# Altium PCB STM32F030F4P6.PcbDoc
Units mil, origin at the board's own origin, x right, y up, seen from the top; angles counter-clockwise.
Board outline 2155 x 3145 mil, 2 copper layers (Top Layer, Bottom Layer); 72 components, 48 nets, 343 pads, 0 vias.
Unrouted connection lines stored in the file: 1.
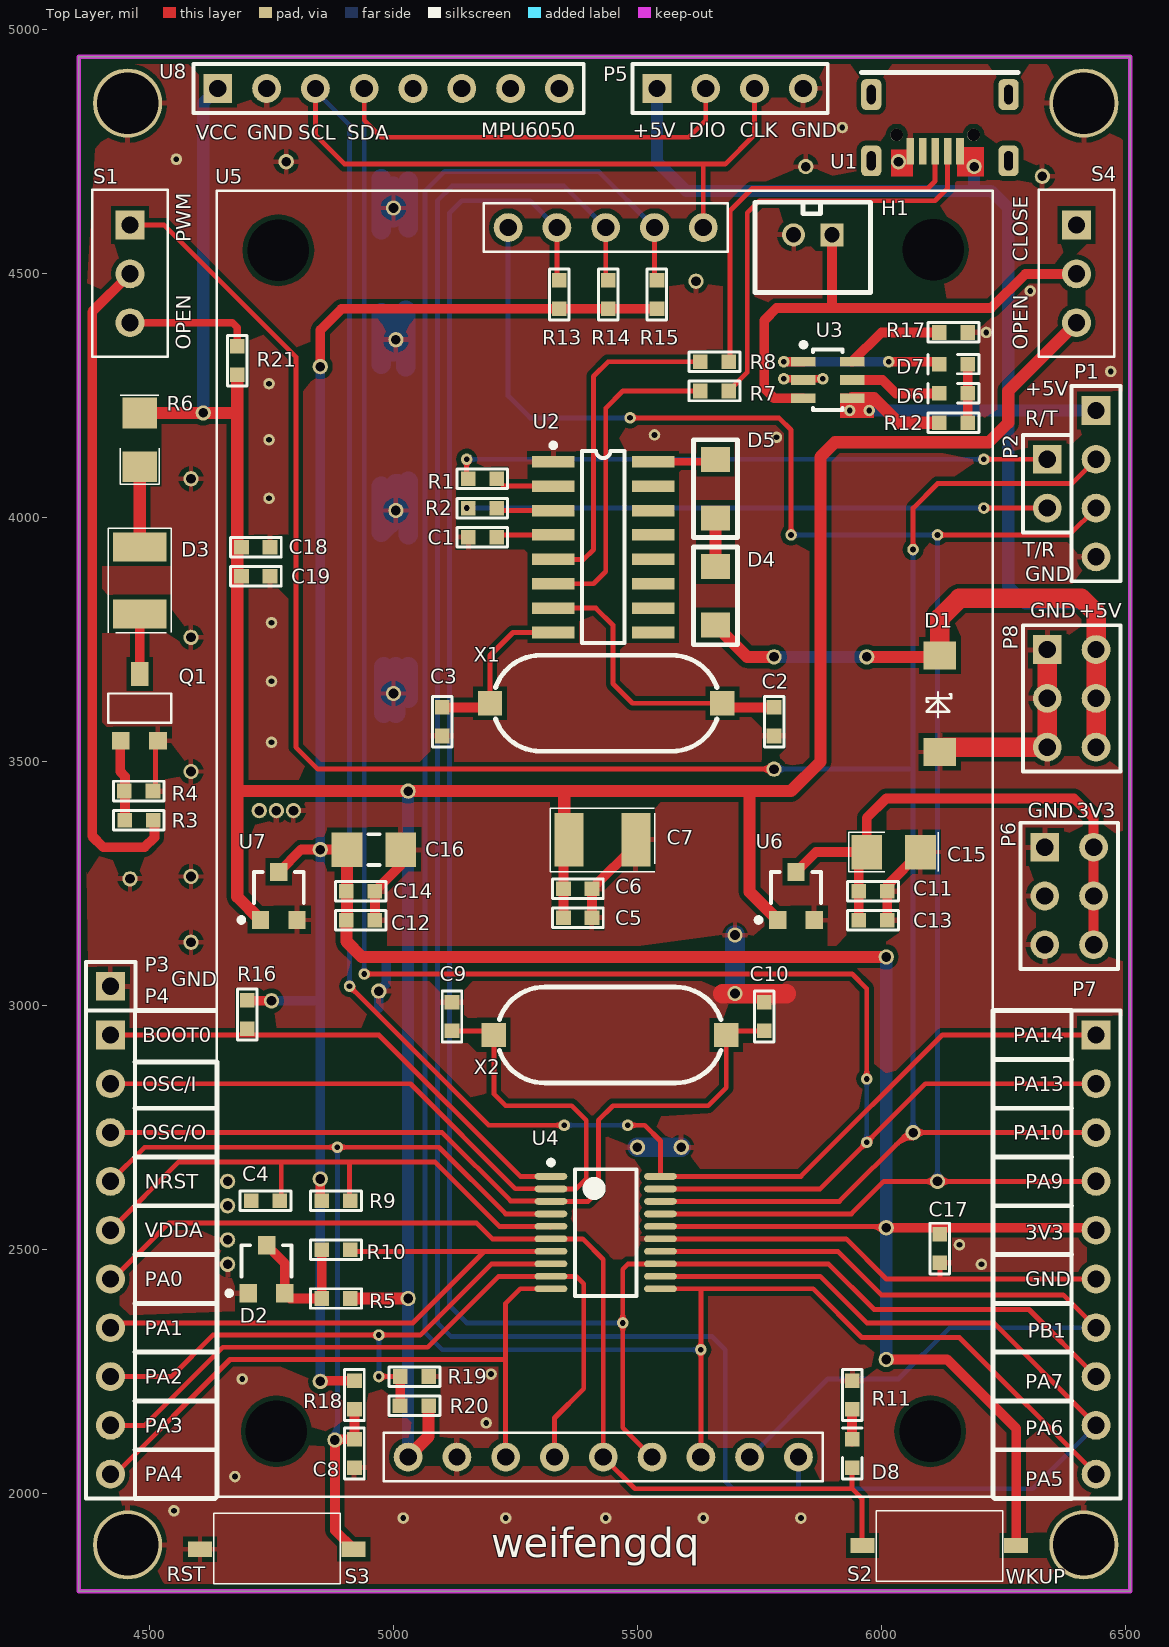
[diagram p0: Top Layer view]
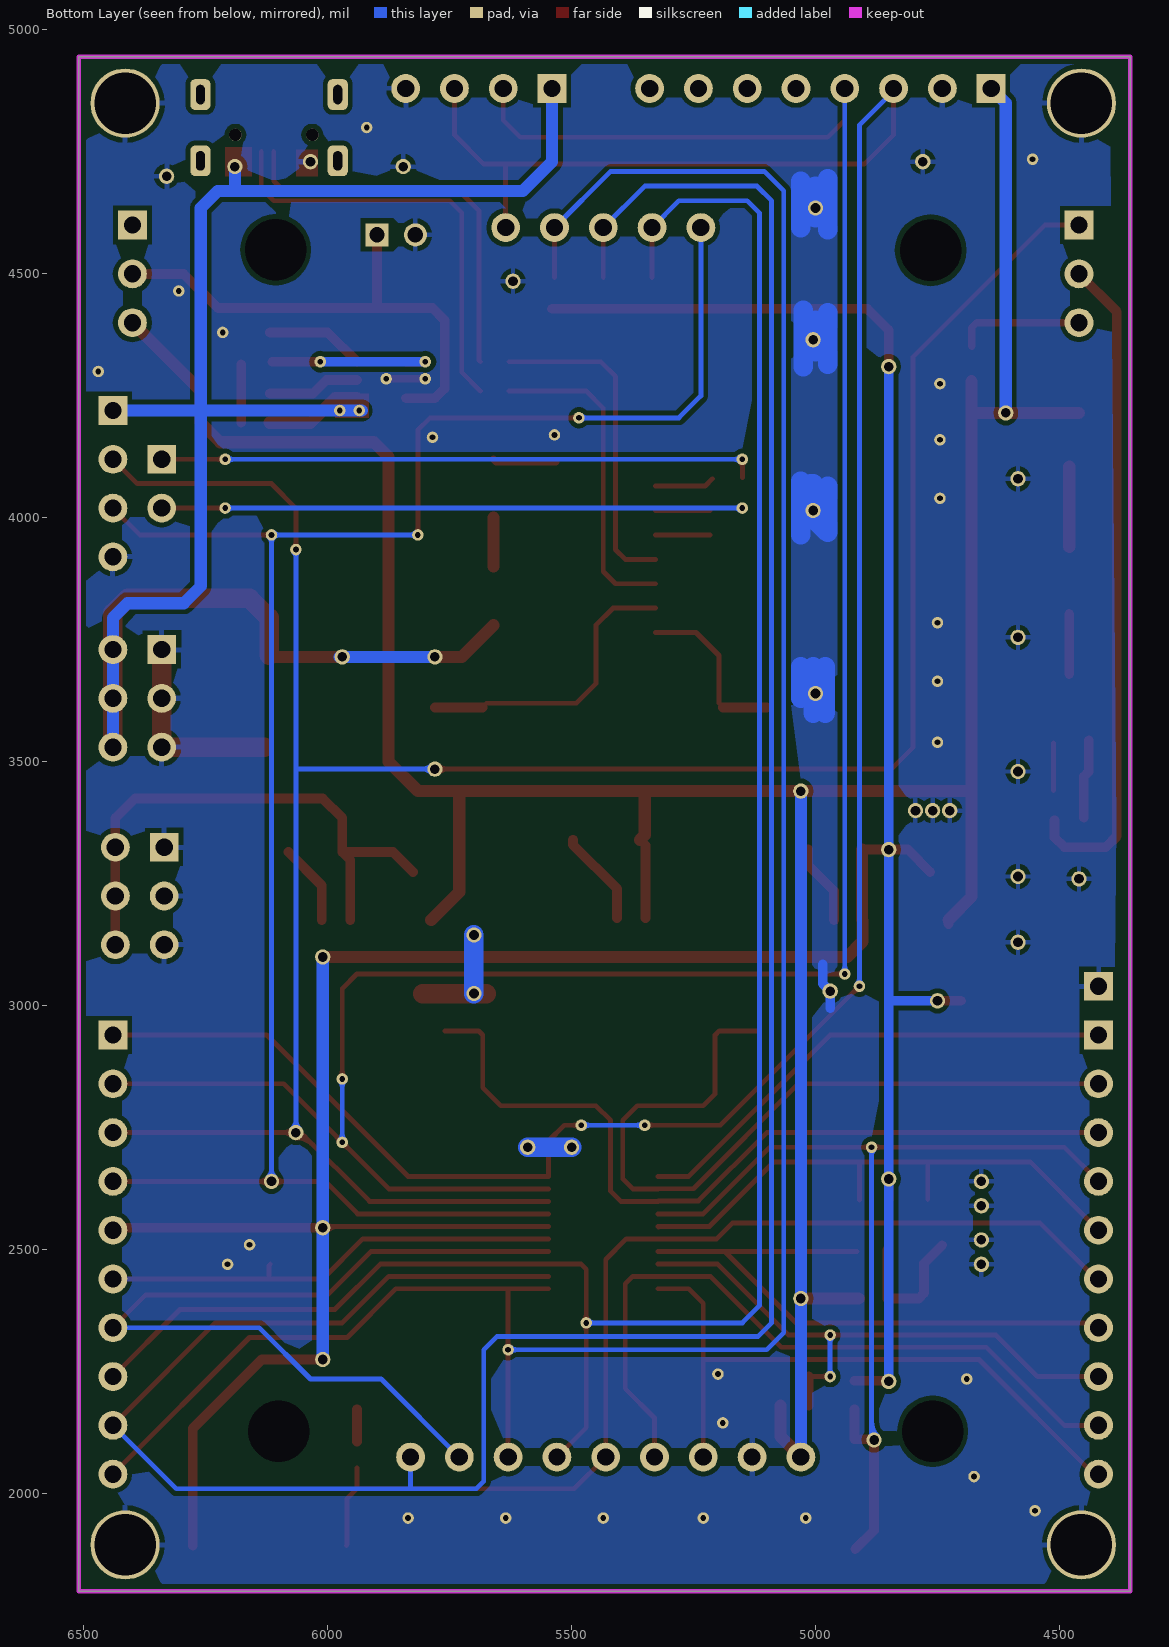
[diagram p1: Bottom Layer view, seen from below]

## Layer stack, top to bottom
Top Layer: signal copper 1.4
Dielectric: dielectric 12.6, FR-4, Dk 4.8
Bottom Layer: signal copper 1.4

## Board outline
4355,4945 6510,4945 6510,1800 4355,1800 4355,4945

## Design rules (kind name [scope] priority, off if disabled: settings)
Clearance [All] p1: gap=10
PolygonConnect [All] p1: connectstyle=Relief reliefconductorwidth=10 reliefentries=4 polygonreliefangle="90 Angle"
RoutingVias [All] p1: holewidth=28 width=50 viastyle="Through Hole" minholewidth=28 minwidth=50 maxholewidth=28 maxwidth=50
SilkToSilkClearance [All] p1 off: silktosilkclearance=10
SilkscreenOverComponentPads [All] p1 off: minsilkscreentomaskgap=10
SolderMaskExpansion [All] p1: expansion=4
TestPointUsage [All] p1: valid=0 allowmultiple=FALSE
Testpoint [All] p1: side=15 testpointundercomponent=TRUE minsize=40 maxsize=100 preferedsize=60 minholesize=0 maxholesize=40 preferedholesize=32 testpointgrid=1 style=1023 order=0-112345678
Width [All] p1: maxlimit=78.74 minlimit=10 preferedwidth=10
22 further rules are at their usual default settings.

## Components (designator, comment, footprint, x,y, rotation, side; value= is the part's Value field where it differs from the comment)
C1 "Cap1" 0603 5180,3960 r0 top
C2 "Cap1" 0603 5780,3580 r90 top
C3 "Cap1" 0603 5100,3580 r90 top
C4 "Cap1" 0603 4740,2600 r180 top
C5 "Cap1" 0603 5380,3180 r180 top
C6 "Cap1" 0603 5380,3240 r180 top
C7 "Cap_Pol" 3528(22u16V钽电容) 5360,3340 r90 top
C8 "Cap1" 0603 4920,2080 r90 top
C9 "Cap1" 0603 5120,2980 r270 top
C10 "Cap1" 0603 5760,2980 r270 top
C11 "Cap1" 0603 5985,3235 r180 top
C12 "Cap1" 0603 4935,3175 r180 top
C13 "Cap1" 0603 5985,3175 r180 top
C14 "Cap1" 0603 4935,3235 r180 top
C15 "Cap_Pol" 3216[1206] 6025,3315 r0 top
C16 "Cap_Pol" 3216[1206] 4960,3320 r0 top
C17 "Cap1" 0603 6120,2500 r90 top
C18 "Cap1" 0603 4720,3940 r180 top
C19 "Cap1" 0603 4720,3880 r180 top
D1 "SMBJ5.0CA" TVS 6120,3520 r90 top
D2 "TL431" SOT-23 4740,2460 r0 top
D3 "3528LED" 3528(22u16V钽电容) 4480,3940 r0 top
D4 "1N4148" 1N4148 5660,3840 r90 top
D5 "1N4148" 1N4148 5660,4060 r90 top
D6 "Green" 0603-Polar 6150,4255 r180 top
D7 "Red" 0603-Polar 6150,4315 r180 top
D8 "LED1" 0603-Polar 5940,2080 r90 top
H1 "2.0mm" "H2-防反 2.0" 5820,4580 r0 top
P1 "Header 4" HDR1X4 6440,4220 r270 top
P2 "Header 2" HDR1X2 6340,4120 r270 top
P3 "TEST" HDR1X1 4420,3040 r0 top
P4 "Header 10" HDR1X10 4420,2940 r270 top
P5 "Header 4" HDR1X4 5540,4880 r0 top
P6 "Header 3X2" HDR2X3 6335,3325 r270 top
P7 "Header 10" HDR1X10 6440,2940 r270 top
P8 "Header 3X2" HDR2X3 6340,3730 r270 top
Q1 "NMOS" "SOT-23-3 - AO3400" 4480,3640 r0 top
R1 "Res1" 0603 5180,4080 r0 top
R2 "Res1" 0603 5180,4020 r0 top
R3 "Res1" 0603 4475.87,3380 r0 top
R4 "Res1" 0603 4480,3440 r180 top
R5 "Res1" 0603 4880,2400 r0 top
R6 "Res1" 3216[1206] 4480,4160 r90 top
R7 "Res1" 0603 5660,4260 r180 top
R8 "Res1" 0603 5660,4320 r180 top
R9 "Res1" 0603 4880,2600 r0 top
R10 "Res1" 0603 4880,2500 r0 top
R11 "Res1" 0603 5940,2200 r90 top
R12 "Res1" 0603 6145.87,4195 r0 top
R13 "Res1" 0603 5340,4460 r270 top
R14 "Res1" 0603 5440,4460 r270 top
R15 "Res1" 0603 5540,4460 r270 top
R16 "Res1" 0603 4700,2980 r90 top
R17 "Res1" 0603 6150,4380 r180 top
R18 "Res1" 0603 4920,2200 r90 top
R19 "Res1" 0603 5040.87,2240 r0 top
R20 "Res1" 0603 5045,2180 r180 top
R21 "Res1" 0603 4680,4320 r90 top
S1 "SW3" SW-3 4460,4600 r270 top
S2 "SW-PB_1" SW-2 6240,1820 r180 top
S3 "SW-PB_1" SW-2 4640,1960 r0 top
S4 "SW3" SW-3 6400,4600 r270 top
U1 "Micro-USB" MICRO-USB-F 6120,4840 r180 top
U2 "CH340G" SOP16M 5430,3940 r270 top
U3 "TP4057" SOT-23-6 5840,4320 r0 top
U4 "STM32F030F4P6" TSSOP20 5435,2535 r0 top
U5 "LCD2.2" "LCD2.2 _2" 4760,2120 r0 top locked
U6 "XC6206P302" SOT-23 5825,3225 r0 top
U7 "XC6206P302" SOT-23 4765,3225 r0 top
U8 "MPU6050" HDR1X8 4640,4880 r0 top
X1 "12M" XTAL_SMD 5340,3620 r0 top
X2 "8M_SMD" XTAL_SMD 5540,2940 r180 top

## Footprints (in the part's own frame and the unit in brackets; to place one, negate y for a bottom-side part, rotate by r counter-clockwise, add the part's x,y. Pads: shape width x height; smd on the part's side, far side on the other; paste and mask are expansions set on the pad)
1N4148 [mm] "Chip Resistor; Body 2.0 x 1.3 mm (LxW typ)"
  rect 1.3x1.5 smd: 1(-1.524,0) 2(1.524,0)
  silkscreen extent -2.54,-1.14 2.54,1.14
0603 [mil]
  rect 30x30 smd: 1(-27,0) 2(31.5,0)
  silkscreen extent -50,-20 54,20
0603-Polar [mil]
  rect 30x30 smd: 1(-27,0) 2(31.5,0)
  silkscreen extent -50,-20 54,20
3216[1206] [mm] "Chip Resistor; Body 3.2 x 1.6 mm (LxW typ)"
  rect 1.6x1.8 smd: 1(-1.4,0) 2(1.4,0)
  silkscreen extent -2.32,-1.02 2.32,1.02
3528(22u16V钽电容) [mm]
  rect 2.8x1.5 smd: 1(0,0) 2(0,-3.475)
  silkscreen extent -1.65,-4.45 1.65,0.97
"H2-防反 2.0" [mm]
  rect 1.2x1.2 hole 0.8: 1(2,0)
  round 1.2 hole 0.8: 2(0,0)
  silkscreen extent -2,-3 4,1.7
HDR1X1 [mm] "Connector; Header; 8 Position"
  rect 1.5x1.5 hole 0.9: 1(0,0)
  silkscreen extent -1.27,-1.27 1.3,1.27
HDR1X2 [mm] "Connector; Header; 2 Position"
  rect 1.5x1.5 hole 0.9: 1(0,0)
  round 1.5 hole 0.9: 2(2.54,0)
  silkscreen extent -1.27,-1.27 3.81,1.27
HDR1X4 [mm] "Connector; Header; 4 Position"
  rect 1.5x1.5 hole 0.9: 1(0,0)
  round 1.5 hole 0.9: 2(2.54,0) 3(5.08,0) 4(7.62,0)
  silkscreen extent -1.27,-1.27 8.89,1.27
HDR1X8 [mm] "Connector; Header; 8 Position"
  rect 1.5x1.5 hole 0.9: 1(0,0)
  round 1.5 hole 0.9: 2(2.54,0) 3(5.08,0) 4(7.62,0) 5(10.16,0) 6(12.7,0) 7(15.24,0) 8(17.78,0)
  silkscreen extent -1.27,-1.27 19.05,1.27
HDR1X10 [mm] "Connector; Header; 10 Position"
  rect 1.5x1.5 hole 0.9: 1(0,0)
  round 1.5 hole 0.9: 2(2.54,0) 3(5.08,0) 4(7.62,0) 5(10.16,0) 6(12.7,0) 7(15.24,0) 8(17.78,0) 9(20.32,0) 10(22.86,0)
  silkscreen extent -1.27,-1.27 24.13,1.27
HDR2X3 [mm] "Connector; Header; 3x2 Position"
  rect 1.5x1.5 hole 0.9: 1(0,0)
  round 1.5 hole 0.9: 2(0,2.54) 3(2.54,0) 4(2.54,2.54) 5(5.08,0) 6(5.08,2.54)
  silkscreen extent -1.27,-1.27 6.35,3.81
"LCD2.2 _2" [mm]
  round 3 hole 3.2: 0(0,0.2) 0(0.1,61.681) 0(34.036,0.2) 0(34.2,61.708)
  round 1.5 hole 0.9: 1(6.858,-1.143) 2(9.398,-1.143) 3(11.938,-1.143) 4(14.478,-1.143) 5(17.018,-1.143) 6(19.558,-1.143) 7(22.098,-1.143) 8(24.638,-1.143) 9(27.178,-1.143) 10(12.065,62.865) 11(14.605,62.865) 12(17.145,62.865) 13(19.685,62.865) 14(22.225,62.865)
  silkscreen extent -3.1,-3.2 37.3,64.77
MICRO-USB-F [mm]
  rrect50% 1.05x1.6 hole 0.45 slot 1 at 90 deg: 0(-3.575,-0.7) 0(-3.575,2.75) 0(3.575,-0.7) 0(3.575,2.75)
  round 0.65 hole 0.65: 0(-1.75,1.4) 0(2.25,1.4)
  rect 0.4x1.4 smd: 1(-1.05,2.25) 2(-0.403,2.25) 3(0.246,2.25) 4(0.897,2.25) 5(1.546,2.25)
  silkscreen extent -4.08,-1.85 4.08,-1.85
SOP16M [mm]
  rect 0.6x2.2 smd: 1(-4.445,-2.6) 2(-3.175,-2.6) 3(-1.905,-2.6) 4(-0.635,-2.6) 5(0.635,-2.6) 6(1.905,-2.6) 7(3.175,-2.6) 8(4.445,-2.6) 9(4.445,2.6) 10(3.175,2.6) 11(1.905,2.6) 12(0.635,2.6) 13(-0.635,2.6) 14(-1.905,2.6) 15(-3.175,2.6) 16(-4.445,2.6)
  silkscreen extent -5.42,-2.72 5,1.1
SOT-23 [mm] "SOT-23; 3 Leads; Body 3.0 x 2.6 mm, inc. leads (LxW max)"
  rect 0.9x0.95 smd: 1(-0.95,-1.25) 2(0.95,-1.25) 3(0,1.25)
  silkscreen extent -2.07,-1.37 1.3,1.25
"SOT-23-3 - AO3400" [mm]
  rect 0.915x0.915 smd: 1(-1,-2.45) 3(0.95,-2.45)
  rect 0.915x1.27 smd: 2(0,1.016)
  silkscreen extent -1.65,-1.52 1.65,0
SOT-23-6 [mil]
  rect 50x20 smd: 1(0,0) 2(0,-37.4) 3(0,-74.8) 4(100,-74.8) 5(100,-37.4) 6(100,0)
  silkscreen extent 0,-99 80,35
SW-2 [mm]
  rect 1.25x0.8 smd: 1(-0.925,-1.875) 2(7.075,-1.875)
  silkscreen extent -0.23,-3.67 6.38,0
SW-3 [mm]
  rect 1.5x1.5 hole 0.9: 1(0,0)
  round 1.5 hole 0.9: 2(2.54,0) 3(5.08,0)
  silkscreen extent -1.84,-1.97 6.86,1.97
TSSOP20 [mm] "TSOP, 20-Leads, Body 6.6x6.6mm (max), Pitch 0.65mm, IPC Medium Density"
  oval 1.7x0.35 smd: 1(-2.85,2.925) 2(-2.85,2.275) 3(-2.85,1.625) 4(-2.85,0.975) 5(-2.85,0.325) 6(-2.85,-0.325) 7(-2.85,-0.975) 8(-2.85,-1.625) 9(-2.85,-2.275) 10(-2.85,-2.925) 11(2.85,-2.925) 12(2.85,-2.275) 13(2.85,-1.625) 14(2.85,-0.975) 15(2.85,-0.325) 16(2.85,0.325) 17(2.85,0.975) 18(2.85,1.625) 19(2.85,2.275) 20(2.85,2.925)
  silkscreen extent -2.97,-3.3 1.6,3.77, body extent -3.3,-3.3 3.3,3.3, height 1.2
TVS [mm]
  rect 1.45x1.7 smd: 1(0,0) 2(5.026,0)
  silkscreen extent 1.81,-0.6 3.11,0.7
XTAL_SMD [mil]
  rect 50x50 smd: 1(-142.13,0) 2(334.25,0)
  silkscreen extent -131,-98 323,98

## Part data
C1 C2 C3 C4 C5 C6 C7 C8 C9 C10 C11 C12 C13 C14 C15 C16 C17 C18 C19: "Capacitor"
D1: library part TVS
D2: library part TL431-SOT23
D3 D6 D7: library part LED1, "Typical INFRARED GaAs LED"
D4 D5: "Default Diode"
D8: "Typical INFRARED GaAs LED"
H1: library part H2-防反
P1 P5: "Header, 4-Pin"
P2: "Header, 2-Pin"
P4 P7: "Header, 10-Pin"
P6 P8: "Header, 3-Pin, Dual row"
Q1: "N-Channel Power MOSFET"
R1 R2 R3 R4 R5 R6 R7 R8 R9 R10 R11 R12 R13 R14 R15 R16 R17 R18 R19 R20 R21: "Resistor"
S1 S2 S3 S4: "Switch"
U2: "USB2UART"
U6 U7: library part 662k
U8: library part MPU6050_1
X1 X2: library part XTAL_1, "Crystal Oscillator"

## Free pads (board coordinates)
  round 141.73 hole 125.98 unplated: 0(4455,1895) 0(4455,4850) 0(6415,1895) 0(6415,4850)
  round 31.5 hole 19.68 unplated: 3(4850,3320) 4(4850,2645) 5(6010,2545) 6(6010,2275) 7(4750,3010) 14(6190,4720) 16(6010,3100) 17(5030,3440) 18(5030,2400) 21(4850,2230) 22(4880,2110) 24(5780,3715) 25(5970,3715) 27(6065,2740) 28(5780,3485) 29(6115,2640) 33(4850,4310) 43(4610,4215) 45(4660,2520) 46(4660,2470) 47(4660,2590) 48(4660,2640) 49(5500,2710) 50(5590,2710) 51(4970,3030) 52(5700,3025) 54(5700,3145) 55(4725,3400) 56(4760,3400) 57(4795,3400) 58(4460,3260) 59(4585,3265) 60(4585,3130) 61(4585,3480) 62(4585,3755) 63(4585,4080) 64(5005,4365) 65(5005,4015) 66(5000,3640) 67(5000,4635) 68(4780,4730) 69(6035,4730) 70(5620,4485) 71(5845,4720) 72(6330,4700)
  round 23.62 hole 11.81 unplated: 9(6210,4020) 10(5150,4020) 11(5150,4120) 12(5800,4320) 13(6015,4320) 15(6210,4120) 19(4970,2325) 20(4970,2240) 23(4885,2710) 26(6065,3935) 30(6115,3965) 32(5815,3965) 34(5630,2295) 35(5470,2350) 36(5485,4205) 37(4940,3065) 38(5970,2850) 39(5970,2720) 40(4910,3040) 41(5350,2755) 44(5480,2755) 73(5975,4220) 74(5935,4220) 75(5880,4285) 76(5800,4285) 77(6215,4380) 80(6305,4465) 81(4745,4275) 82(4745,4160) 83(4745,4040) 84(4750,3785) 85(4750,3665) 86(4750,3540) 87(5190,2145) 88(5200,2245) 89(4675,2035) 90(4690,2235) 91(4550,1965) 92(5020,1950) 93(5230,1950) 94(5435,1950) 95(5635,1950) 96(5835,1950) 97(6160,2510) 98(6205,2470) 99(5535,4170) 100(5785,4165) 101(5920,4800) 102(4555,4735) 103(6470,4300)

## Nets (pads, with @x,y where several pads share a name; then routed paths per layer and width w, separated by ;. In a path a pad name is that pad's centre, name@x,y a point inside that pad or via, vN(x,y) a via of type N, cw(c..) or ccw(c..) an arc to the next point about the centre after c; other vN are vias at no path point)
3.3: C11.2 C13.2 C15.1 P6.2 P6.4 P6.6 U6.3 | length 1136.7
  Top Layer w20: U6.3 5865.79,3315 C15.1 ; C13.2 C11.2 5953.5,3298.62 C15.1 ; P6.6 P6.4 P6.2 6435,3385 6395,3425 6010,3425 5969.88,3384.88 C15.1
3.3V: C12.2 C14.2 C16.1 C17.2 P7.5 pad.3 pad.4 pad.5 pad.6 pad.7 pad.16 pad.21 pad.33 R9.1 R13.2 R14.2 R15.2 R16.2 R18.2 S2.1 U4.16 U7.3 | length 6919
  Top Layer w10: U4.16 6007.2,2547.8 pad.5 ; 5977.3,2547.8 cw(c5977.3,2512.3) pad.5@6002.4,2537.4 ; 5990.8,2547.8 ccw(c5990.8,2564.2) pad.5@6002.4,2552.6
  Top Layer w20: R16.2@4701.5,3010 pad.7 ; U7.3 4810.79,3320 C16.1 ; R9.1@4850,2603 pad.4 ; pad.33@4850,4315 4850,4385 4893.5,4428.5 R13.2 R14.2 R15.2 ; pad.21@4851.5,2231.5 R18.2 ; pad.21@4854.06,2225.94 cw(c4867.49,2212.51) 4867.49,2231.5 ; pad.6 6135,2275 6276.42,2133.58 S2.1 ; pad.5 6435,2545 P7.5
  Top Layer w25: C12.2 4903.5,3131.5 4935,3100 pad.16 ; C12.2@4904.88,3176.38 C16.1
  Bottom Layer w20: pad.7 4845,3010 ; pad.21 pad.4 pad.3 pad.33
  Bottom Layer w25: pad.6 pad.5 pad.16
ADC_LI: P4.8 pad.19 pad.20 R19.1 R20.2 U4.8 | length 1316.1
  Top Layer w10: P4.8 4545,2240 4630,2325 5055,2325 5201.02,2471.02 U4.8 ; pad.19@4965.18,2320.18 ccw(c4953.56,2308.56) 4953.56,2325 ccw(c4953.56,2341.44) pad.19@4965.18,2329.82 ; pad.20 R19.1 ; pad.20@4974.82,2235.18 cw(c4986.44,2223.56) 4986.44,2240 cw(c4986.44,2256.44) pad.20@4974.82,2244.82 ; pad.19@4974.82,2320.18 cw(c4986.44,2308.56) 4986.44,2325 cw(c4986.44,2341.44) pad.19@4974.82,2329.82
  Top Layer w20: R20.2@5013.87,2180.36 R19.1
  Bottom Layer w10: pad.20@4965.18,2244.82 ccw(c4953.56,2256.44) 4970,2256.44 ccw(c4986.44,2256.44) pad.20@4974.82,2244.82 ; pad.19@4965.18,2320.18 cw(c4953.56,2308.56) 4970,2308.56 cw(c4986.44,2308.56) pad.19@4974.82,2320.18 ; pad.20 pad.19
BOOT0: P4.1 R16.1 U4.1 | length 1022.9
  Top Layer w10: P4.1 4970,2940 5259.84,2650.16 U4.1
D+: R8.2 U2.5 | length 676.6
  Top Layer w10: U2.5 5390,3915 5410,3935 5410,4290 5440,4320 R8.2
D-: R7.2 U2.6 | length 660.7
  Top Layer w10: U2.6 5410,3865 5435,3890 5435,4225 5470,4260 R7.2
FLASH_CS: P5.3 P7.1 pad.40 pad.41 pad.44 U4.20 U5.14 U8.3 | length 5147.8
  Top Layer w10: U8.3 4840,4785 4900,4725 5635,4725 ; pad.40@4910,3033.19 cw(c4910,3016.75) 4921.63,3028.37 cw(c4933.25,3040) pad.40@4916.81,3040 ; pad.40 5195,2755 pad.41 ; pad.41@5345.18,2750.18 ccw(c5333.56,2738.56) 5333.56,2755 ccw(c5333.56,2771.44) pad.41@5345.18,2759.82 ; pad.44 5515,2755 5547.2,2722.8 U4.20 5835.16,2650.16 6125,2940 P7.1 ; pad.44@5484.82,2750.18 cw(c5496.44,2738.56) 5496.44,2755 cw(c5496.44,2771.44) pad.44@5484.82,2759.82 ; U5.14 5635,4725 ; P5.3 5740,4785 5680,4725 5635,4725
  Bottom Layer w10: U8.3 4840,4875 4910,4805 pad.40 ; pad.40@4905.18,3044.82 ccw(c4893.56,3056.44) 4910,3056.44 ccw(c4926.44,3056.44) pad.40@4914.82,3044.82 ; pad.41 pad.44 ; pad.41@5354.82,2750.18 cw(c5366.44,2738.56) 5366.44,2755 cw(c5366.44,2771.44) pad.41@5354.82,2759.82 ; pad.44@5475.18,2750.18 ccw(c5463.56,2738.56) 5463.56,2755 ccw(c5463.56,2771.44) pad.44@5475.18,2759.82
GND: C1.1 C2.1 C3.1 C4.2 C5.1 C6.1 C7.2 C8.1 C9.1 C10.1 C11.1 C12.1 C13.1 C14.1 C15.2 C16.2 C17.1 C18.1 C19.1 D1.1 D2.1 H1.2 P1.4 P3.1 P5.4 P6.1 P6.3 P6.5 P7.6 P8.1 P8.3 P8.5 pad.0 pad.45 pad.46 pad.47 pad.48 pad.49 pad.50 pad.51 pad.52 pad.54 pad.55 pad.56 pad.57 pad.58 pad.59 pad.60 pad.61 pad.62 pad.63 pad.64 pad.65 pad.66 pad.67 pad.68 pad.69 pad.70 pad.71 pad.72 pad.75 pad.76 pad.77 pad.80 pad.81 pad.82 pad.83 pad.84 pad.85 pad.86 pad.87 pad.88 pad.89 pad.90 pad.91 pad.92 pad.93 pad.94 pad.95 pad.96 pad.97 pad.98 pad.99 pad.100 pad.101 pad.102 pad.103 Q1.3 R4.1 R11.2 R17.1 R19.2 S3.1 U1.5 U2.1 U3.2 U4.15 U5.2 U6.2 U7.2 U8.2 | length 3734
  Top Layer w10: R4.1@4512.4,3441.27 Q1.3@4512.4,3538.54 ; U4.15 5927.8,2522.2 6010,2440 6117.5,2440 ; C17.1@6117.5,2470.5 6120,2468 6120,2442.5 6117.5,2440 ; P7.6 6117.5,2440
  Top Layer w15: pad.76 pad.75
  Top Layer w20: C12.1 C14.1 5015.12,3288.12 C16.2 ; C5.1 C6.1 5496.81,3329.81 C7.2 ; C13.1 C11.1 6012,3246.88 C15.2
  Top Layer w40: 5675,3025 pad.52 5805,3025 ; D1.1@6130,3530 P8.5 P8.3 P8.1
  Bottom Layer w20: 4970,2995 pad.51 4985,3045 4985,3085
  Bottom Layer w40: 4975,4065 4975,3970 5005,4000 5005,4070 5010,4070 5010,4000 5025,4015 ; 4975,4315 4975,4420 ; 4975,4590 4975,4695 ; 4980,3600 4980,3695 ; 5000,4340 5000,4405 ; 5000,4615 pad.67 5000,4680 ; 5005,3600 5005,3695 ; 5025,4310 5025,4425 ; 5030,3630 5030,3695 ; 5030,3965 5030,4075 ; 5030,4595 5030,4690 ; pad.49 pad.50 ; pad.52 pad.54
KEY0: D8.1 P4.6 S2.2 U4.6 U5.5 | length 2198.7
  Top Layer w10: P4.6 4425,2440 4540,2555 5170,2555 5202.8,2522.2 U4.6 5387.8,2522.2 5430,2480 U5.5 5495,2010 5940,2010 ; D8.1 5940,2010 ; S2.2 5960,1895.28 5960,1990 5940,2010
LCD_CS: P4.10 U4.10 U5.3 | length 1327.5
  Top Layer w10: P4.10 4430,2040 4665,2275 5085,2275 5230,2275 ; U5.3 5230,2390 5259.84,2419.84 U4.10
LCD_LED: P7.7 U4.14 U5.8 | length 1777.4
  Top Layer w10: U4.14 5910.89,2496.61 6000,2407.5 6372.5,2407.5 P7.7
  Bottom Layer w10: U5.8 5890,2235 6035,2235 6140,2340 P7.7
LCD_RST: P4.9 U4.9 U5.4 | length 1482.8
  Top Layer w10: P4.9 4490,2140 4650,2300 5070,2300 5215.43,2445.43 U4.9 5374.57,2445.43 5390,2430 5390,2215 5330,2155 U5.4
NetC1_2: C1.2 U2.4 | length 111.1
  Top Layer w10: C1.2@5216.5,3965 U2.4
NetC2_2: C2.2 U2.7 X1.2 | length 594.9
  Top Layer w10: U2.7 5415,3815 5450,3780 5450,3660 5490,3620 X1.2
  Top Layer w20: X1.2@5682.75,3611.5 C2.2
NetC3_2: C3.2 U2.8 X1.1 | length 336.5
  Top Layer w10: X1.1 5197.87,3717.87 5245,3765 U2.8
  Top Layer w20: C3.2 X1.1@5189.37,3611.5
NetC4_1: C4.1 P4.5 R9.2 U4.5 | length 1172.8
  Top Layer w10: P4.5 4560,2680 4770,2680 ; C4.1@4770,2603 4770,2680 ; R9.2@4910,2601.5 4910,2680 ; U4.5@5321.57,2546.57 U4.5 5217.2,2547.8 5085,2680 4910,2680 ; 4770,2680 4910,2680
NetD3_1: D3.1 R6.1 | length 164.9
  Top Layer w25: D3.1 R6.1
NetD3_2: D3.2 Q1.2 | length 123.2
  Top Layer w20: Q1.2 D3.2
NetD4_2: D4.2 D5.1 | length 100
  Top Layer w25: D4.2 D5.1
NetD5_2: D5.2 U2.16 | length 129.7
  Top Layer w15: U2.16 5655,4115 D5.2
NetD6_1: D6.1 D7.1 R12.2 | length 119.6
  Top Layer w20: R12.2@6177,4195.36 D6.1 D7.1
NetD6_2: D6.2 U3.5 | length 189.9
  Top Layer w20: U3.5 6002.4,4282.6 6030,4255 D6.2
NetD7_2: D7.2 pad.12 pad.13 U3.1 | length 353.5
  Top Layer w20: pad.12 U3.1 ; pad.13 D7.2@6113.5,4320
  Bottom Layer w20: pad.12 pad.13
NetD8_2: D8.2 R11.1 | length 66
  Top Layer w20: D8.2@5940,2107 R11.1
NetH1_1: H1.1 S4.2 U3.3 | length 1052.6
  Top Layer w20: U3.3 5779.8,4245.2 5760,4265 5760,4405 5785,4430 6225,4430 6295,4500 S4.2 ; 5898.74,4435 H1.1
NetP2_1: P2.1 pad.11 pad.15 R1.1 | length 1330.3
  Top Layer w10: pad.11@5145.18,4115.18 cw(c5133.56,4103.56) 5150,4103.56 cw(c5166.44,4103.56) pad.11@5154.82,4115.18 ; R1.1@5150,4083 pad.11 ; pad.15 P2.1 ; pad.15@6214.82,4115.18 cw(c6226.44,4103.56) 6226.44,4120 cw(c6226.44,4136.44) pad.15@6214.82,4124.82
  Bottom Layer w10: pad.11 pad.15 ; pad.11@5154.82,4115.18 cw(c5166.44,4103.56) 5166.44,4120 cw(c5166.44,4136.44) pad.11@5154.82,4124.82 ; pad.15@6205.18,4115.18 ccw(c6193.56,4103.56) 6193.56,4120 ccw(c6193.56,4136.44) pad.15@6205.18,4124.82
NetP2_2: P2.2 pad.9 pad.10 R2.1 | length 1267.5
  Top Layer w10: pad.9 P2.2 ; pad.9@6214.82,4015.18 cw(c6226.44,4003.56) 6226.44,4020 cw(c6226.44,4036.44) pad.9@6214.82,4024.82
  Bottom Layer w10: pad.10 pad.9 ; pad.10@5154.82,4015.18 cw(c5166.44,4003.56) 5166.44,4020 cw(c5166.44,4036.44) pad.10@5154.82,4024.82 ; pad.9@6205.18,4015.18 ccw(c6193.56,4003.56) 6193.56,4020 ccw(c6193.56,4036.44) pad.9@6205.18,4024.82
NetP4_7: P4.7 R10.2 U4.7 | length 1239.4
  Top Layer w10: P4.7 4430,2350 5040,2350 5186.61,2496.61 ; R10.2@4914.88,2496.61 5186.61,2496.61 ; U4.7 5186.61,2496.61
NetQ1_1: Q1.1 R3.1 R4.2 | length 162.6
  Top Layer w20: Q1.1@4440,3543.54 4440,3480 4450,3470 R3.1@4450,3385.06
NetR1_2: R1.2 U2.2 | length 122.4
  Top Layer w10: R1.2 5226.5,4065 U2.2
NetR2_2: R2.2 U2.3 | length 111.1
  Top Layer w10: R2.2@5216.5,4015 U2.3
NetR3_2: R3.2 S1.2 | length 1364.6
  Top Layer w20: S1.2 4382.62,4422.62 4382.62,3347.38 4405,3325 4490,3325 4510,3345 R3.2@4510,3380
NetR7_1: R7.1 U1.2 | length 888.2
  Top Layer w10: R7.1 5725,4298 5725,4625 5750,4650 6110,4650 6135.89,4675.89 U1.2
NetR8_1: R8.1 U1.3 | length 817.6
  Top Layer w10: R8.1 5690,4323 5690,4630 5735,4675 6095,4675 6110.3,4690.3 U1.3
NetR17_2: R17.2 U3.6 | length 203.4
  Top Layer w20: U3.6 6000,4380 R17.2
NetR21_2: R21.2 S1.3 | length 262.6
  Top Layer w15: S1.3 4670,4400 4680,4390 R21.2
NRST: C8.2 P4.4 pad.22 pad.23 R18.1 S3.2 U4.4 | length 2064.4
  Top Layer w10: P4.4 4490,2710 5093.39,2710 5230,2573.39 U4.4 ; pad.23@4880.18,2705.18 ccw(c4868.56,2693.56) 4868.56,2710 ccw(c4868.56,2726.44) pad.23@4880.18,2714.82 ; pad.23@4889.82,2705.18 cw(c4901.44,2693.56) 4901.44,2710 cw(c4901.44,2726.44) pad.23@4889.82,2714.82
  Top Layer w20: pad.22@4884.06,2105.94 cw(c4897.49,2092.51) 4897.49,2111.5 ; S3.2 4880,1924.72 4880,2107.99 4876.5,2111.5 C8.2 R18.1
  Bottom Layer w10: pad.22@4872.4,2117.6 ccw(c4841.98,2148.02) 4885,2148.02 ; pad.22 4885,2115 pad.23 ; pad.23@4880.18,2705.18 cw(c4868.56,2693.56) 4885,2693.56 cw(c4901.44,2693.56) pad.23@4889.82,2705.18
OSC_IN: C9.2 P4.2 U4.2 X2.2 | length 1614.4
  Top Layer w10: P4.2 5035,2840 5250,2625 5322.36,2625 U4.2 5374.57,2624.57 5395,2645 5395,2765 5365,2795 5230,2795 5205.75,2819.25 X2.2 5197.25,2948.5 C9.2
OSC_OUT: C10.2 P4.3 U4.3 X2.1 | length 1691.3
  Top Layer w10: P4.3 5100,2740 5240,2600 5321.77,2600 U4.3 5398.98,2598.98 5420,2620 5420,2765 5450,2795 5645,2795 5682.13,2832.13 X2.1 5690.63,2948.5 C10.2
PWM0: P1.2 P7.3 pad.26 pad.27 pad.28 S1.1 U4.18 | length 5462.5
  Top Layer w10: S1.1 4530,4600 4800,4330 4800,3530 4845,3485 pad.28@5785,3485 ; U4.18 5913.98,2598.98 6055,2740 P7.3 ; pad.28@5772.4,3477.4 ccw(c5754.05,3459.05) 5754.05,3485 ccw(c5754.05,3510.95) pad.28@5772.4,3492.6 ; 6029.58,2714.58 cw(c6065,2679.16) pad.27@6065,2729.25 ; 6046.65,2731.65 cw(c6065,2713.3) pad.27@6065,2739.25 ; pad.26@6060.18,3939.82 ccw(c6048.56,3951.44) 6065,3951.44 ccw(c6081.44,3951.44) pad.26@6069.82,3939.82 ; pad.26 6065,4020 6115,4070 6390,4070 P1.2 ; pad.27@6072.6,2732.4 cw(c6090.95,2714.05) 6090.95,2740 cw(c6090.95,2765.95) pad.27@6072.6,2747.6
  Bottom Layer w10: pad.28 6065,3485 ; pad.28@5787.6,3477.4 cw(c5805.95,3459.05) 5805.95,3485 cw(c5805.95,3510.95) pad.28@5787.6,3492.6 ; pad.27@6057.4,2747.6 ccw(c6039.05,2765.95) 6065,2765.95 ccw(c6090.95,2765.95) pad.27@6072.6,2747.6 ; pad.26@6060.18,3930.18 cw(c6048.56,3918.56) 6065,3918.56 cw(c6081.44,3918.56) pad.26@6069.82,3930.18 ; pad.27 6065,3485 ; pad.26 6065,3485
SD_CS: P1.3 P7.4 pad.29 pad.30 pad.32 pad.36 U4.17 U5.10 | length 4365.2
  Top Layer w10: pad.36 5790,4205 5815,4180 pad.32 ; pad.36@5489.82,4200.18 cw(c5501.44,4188.56) 5501.44,4205 cw(c5501.44,4221.44) pad.36@5489.82,4209.82 ; U4.17 5938.39,2573.39 6005,2640 P7.4 ; pad.32@5810.18,3969.82 ccw(c5798.56,3981.44) 5815,3981.44 ccw(c5831.44,3981.44) pad.32@5819.82,3969.82 ; pad.29@6107.4,2632.4 ccw(c6089.05,2614.05) 6089.05,2640 ccw(c6089.05,2665.95) pad.29@6107.4,2647.6 ; pad.30 6145,3965 6385,3965 P1.3 ; pad.30@6119.82,3960.18 cw(c6131.44,3948.56) 6131.44,3965 cw(c6131.44,3981.44) pad.30@6119.82,3969.82 ; pad.29@6122.6,2632.4 cw(c6140.95,2614.05) 6140.95,2640 cw(c6140.95,2665.95) pad.29@6122.6,2647.6
  Bottom Layer w10: U5.10 5235,4250 5280,4205 pad.36 ; pad.36@5480.18,4200.18 ccw(c5468.56,4188.56) 5468.56,4205 ccw(c5468.56,4221.44) pad.36@5480.18,4209.82 ; pad.32 pad.30 pad.29 ; pad.32@5819.82,3960.18 cw(c5831.44,3948.56) 5831.44,3965 cw(c5831.44,3981.44) pad.32@5819.82,3969.82 ; pad.29@6107.4,2647.6 ccw(c6089.05,2665.95) 6115,2665.95 ccw(c6140.95,2665.95) pad.29@6122.6,2647.6 ; pad.30@6110.18,3969.82 cw(c6098.56,3981.44) 6098.56,3965 cw(c6098.56,3948.56) 6110.18,3960.18 cw(c6098.56,3948.56) 6115,3948.56 cw(c6131.44,3948.56) pad.30@6119.82,3960.18
SDA: P5.2 P7.2 pad.37 pad.38 pad.39 U4.19 U8.4 | length 5189.3
  Top Layer w10: pad.37 5940,3065 5970,3035 pad.38 ; U8.4 4940,4815 4975,4780 5605,4780 5640,4815 P5.2 ; pad.37@4944.82,3060.18 cw(c4956.44,3048.56) 4956.44,3065 cw(c4956.44,3081.44) pad.37@4944.82,3069.82 ; U4.19 5874.57,2624.57 6090,2840 P7.2 ; pad.39@5963.19,2720 cw(c5946.75,2720) 5958.37,2708.37 cw(c5970,2696.75) pad.39@5970,2713.19 ; pad.38@5965.18,2854.82 ccw(c5953.56,2866.44) 5970,2866.44 ccw(c5986.44,2866.44) pad.38@5974.82,2854.82 ; pad.39@5970,2726.81 ccw(c5970,2743.25) 5981.63,2731.63 ccw(c5993.25,2720) pad.39@5976.81,2720
  Bottom Layer w10: pad.37@4935.18,3069.82 ccw(c4923.56,3081.44) 4940,3081.44 ccw(c4956.44,3081.44) pad.37@4944.82,3069.82 ; pad.37@4940,3070 U8.4 ; pad.39@5965.18,2724.82 ccw(c5953.56,2736.44) 5970,2736.44 ccw(c5986.44,2736.44) pad.39@5974.82,2724.82 ; pad.38@5965.18,2845.18 cw(c5953.56,2833.56) 5970,2833.56 cw(c5986.44,2833.56) pad.38@5974.82,2845.18 ; pad.39 pad.38
SPI_MISO: P7.9 R14.1 U4.12 U5.9 U5.12 | length 5558
  Top Layer w10: R14.1@5435,4492 U5.12 ; U4.12 5874.57,2445.43 5970,2350 6230,2350 6422.5,2157.5 P7.9@6422.5,2152.5
  Bottom Layer w10: U5.12 5350,4680 5120,4680 5090,4650 5090,2350 5118.19,2321.81 5653.19,2321.81 5680,2295 5680,2025 5695,2010 6310,2010 P7.9 ; 5830,2015 U5.9
SPI_MOSI: P7.8 pad.35 R13.1 U4.13 U5.6 U5.11 | length 4523.2
  Top Layer w10: R13.1@5335,4492 U5.11 ; pad.35@5465.18,2345.18 cw(c5453.56,2333.56) 5470,2333.56 cw(c5486.44,2333.56) pad.35@5474.82,2345.18 ; pad.35@5465.18,2354.82 ccw(c5453.56,2366.44) 5470,2366.44 ccw(c5486.44,2366.44) pad.35@5474.82,2354.82 ; U5.6 5470,2135 5470,2460 5481.02,2471.02 U4.13 5891.48,2471.02 5985,2377.5 6302.5,2377.5 P7.8
  Bottom Layer w10: U5.11 5280,4650 5140,4650 5115,4625 5115,2385 5150,2350 pad.35 ; pad.35@5465.18,2345.18 ccw(c5453.56,2333.56) 5453.56,2350 ccw(c5453.56,2366.44) pad.35@5465.18,2354.82
SPI_SCK: P7.10 pad.34 R15.1 U4.11 U5.7 U5.13 | length 5029.2
  Top Layer w10: R15.1@5535,4492 U5.13 ; U4.11 5630,2419.84 ; pad.34@5625.18,2290.18 cw(c5613.56,2278.56) 5630,2278.56 cw(c5646.44,2278.56) pad.34@5634.82,2290.18 ; pad.34@5625.18,2299.82 ccw(c5613.56,2311.44) 5630,2311.44 ccw(c5646.44,2311.44) pad.34@5634.82,2299.82 ; U5.7 5630,2419.84 ; P7.10 6160,2320 5960,2320 5860.16,2419.84 5630,2419.84
  Bottom Layer w10: U5.13 5420,4710 5105,4710 5065,4670 5065,2330 5100,2295 pad.34 ; pad.34@5625.18,2290.18 ccw(c5613.56,2278.56) 5613.56,2295 ccw(c5613.56,2311.44) pad.34@5625.18,2299.82
VCC_LI: C5.2 C6.2 C7.1 C18.2 C19.2 pad.17 pad.18 pad.43 R5.2 R6.2 R20.1 R21.1 S4.3 U5.1 U6.1 U7.1 U8.1 | length 6693.3
  Top Layer w20: U7.1@4727.6,3167.4 U7.1 ; C5.2 C6.2 C7.1@5348.5,3328.5
  Top Layer w25: R6.2@4460,4215.12 4675.12,4215.12 ; R21.1@4680,4280 4680,4215.12 4680,3440 ; U7.1 4680,3223.39 4680,3440 ; R5.2 pad.18 ; U5.1 5072,2117 R20.1 ; C7.1 5350,3350 5350,3440 ; U6.1 5730,3233.39 5730,3440 ; S4.3 6260,4260 6260,4195 6220,4155 5905,4155 5875,4125 5875,3500 5815,3440 5730,3440 ; 4680,3440 pad.17 5350,3440 ; 5350,3440 5730,3440
  Bottom Layer w25: pad.43 4610,4850 U8.1 ; U5.1 pad.17
VCC_USB: D1.2 D4.1 P1.1 P5.1 P8.2 P8.4 P8.6 pad.14 pad.24 pad.25 pad.73 pad.74 R12.1 U1.1 U3.4 | length 4096.1
  Top Layer w25: D4.1 5725,3715 pad.24 ; U3.4 5984.8,4245.2 6035,4195 R12.1 ; pad.25 D1.2@6117.13,3715
  Top Layer w40: D1.2 6120,3795 6160,3835 6410,3835 6440,3805 P8.2 P8.4 P8.6
  Bottom Layer w25: P5.1 5540,4730 5600,4670 6225,4670 6260,4635 6260,4220 ; pad.24 pad.25@5975,3715 ; pad.74@5930,4220 6260,4220 ; 6190,4680 pad.14 ; P8.6 P8.4 P8.2 6440,3795 6410,3825 6295,3825 6260,3860 6260,4220 ; P1.1 6260,4220
VREF_2.5V: D2.2 D2.3 R5.1 R10.1 | length 294
  Top Layer w20: D2.3 4777.4,2471.81 D2.2 4788.19,2400 R5.1 R10.1
pads on no net: S4.1 U1.0 U1.4 U2.9 U2.10 U2.11 U2.12 U2.13 U2.14 U2.15 U5.0 U8.5 U8.6 U8.7 U8.8

## Polygon pours and split planes (outlines as drawn)
GND on Top Layer "Bottom Layer-No Net" (solid, remove dead copper, pour order 1000): 4355,4945 6510,4945 6510,1800 4355,1800 4355,4945
GND on Bottom Layer "Bottom Layer-No Net" (solid, remove dead copper, pour order 1001): 4355,4945 6510,4945 6510,1800 4355,1800 4355,4945

## Keep-outs
Keep-Out Layer:
  the board outline again, w10

## Other copper
Top Layer:
  rectangle net VCC_USB: 6155,4700 6210,4760
  rectangle net GND: 6020,4700 6065,4755
  rectangle net VCC_USB: 5915,4205 5985,4255

## Silkscreen, mask and mechanical layers (free items; w line width, h text height)
Top Overlay:
  lines w10: 4470,1990 4633.94,1990 4637.95,1994.02 4637.95,2885 4470,2885 ; 4470,2090 4635,2090 ; 4470,2190 4635,2190 ; 4470,2290 4635,2290 ; 4470,2390 4635,2390 ; 4470,2490 4635,2490 ; 4470,2590 4635,2590 ; 4470,2690 4635,2690 ; 4470,2790 4635,2790 ; 4471.18,2990 4635,2990 ; 6230,2090 6390,2090 ; 6230,2190 6390,2190 ; 6230,2290 6390,2290 ; 6230,2390 6390,2390 ; 6230,2490 6390,2490 ; 6230,2590 6390,2590 ; 6230,2690 6390,2690 ; 6230,2790 6390,2790 ; 6230,2890 6390,2890 ; 6390,1990 6232.52,1990 6228.5,1994.02 6228.5,2990 6390,2990
  text "MPU6050" at 5180,4780 h30
  text "+5V" at 5490,4780 h30
  text "DIO" at 5605,4780 h30
  text "CLK" at 5710,4780 h30
  text "GND" at 5815,4780 h30
  text "VCC" at 4595,4775 h30
  text "GND" at 4700,4775 h30
  text "SCL" at 4805,4775 h30
  text "SDA" at 4905,4775 h30
  text "PWM" at 4585,4565 h30 r90
  text "CLOSE" at 6300,4525 h30 r90
  text "OPEN" at 4585,4345 h30 r90
  text "OPEN" at 6300,4345 h30 r90
  text "+5V" at 6295,4250 h30
  text "R/T" at 6295,4190 h30
  text "T/R" at 6290,3920 h30
  text "GND" at 6295,3870 h30
  text "GND" at 6305,3795 h30
  text "+5V" at 6405,3795 h30
  text "GND" at 6300,3385 h30
  text "3V3" at 6400,3385 h30
  text "GND" at 4544.98,3039.99 h30
  text "BOOT0" at 4485,2925 h30
  text "PA14" at 6270,2925 h30
  text "OSC/I" at 4485,2825 h30
  text "PA13" at 6270,2825 h30
  text "OSC/O" at 4485,2725 h30
  text "PA10" at 6270,2725 h30
  text "NRST" at 4490,2625 h30
  text "PA9" at 6295,2625 h30
  text "VDDA" at 4490,2525 h30
  text "3V3" at 6295,2520 h30
  text "PA0" at 4490,2425 h30
  text "GND" at 6295,2425 h30
  text "PA1" at 4490,2325 h30
  text "PB1" at 6300,2320 h30
  text "PA2" at 4490,2225 h30
  text "PA7" at 6295,2215 h30
  text "PA3" at 4490,2125 h30
  text "PA6" at 6295,2120 h30
  text "PA4" at 4490,2025 h30
  text "PA5" at 6295,2015 h30
  text "weifengdq" at 5200,1870 h60
  text "RST" at 4535,1820 h30
  text "WKUP" at 6255,1815 h30